# EAGLE board Band-PCB (EAGLE 9.6.2)
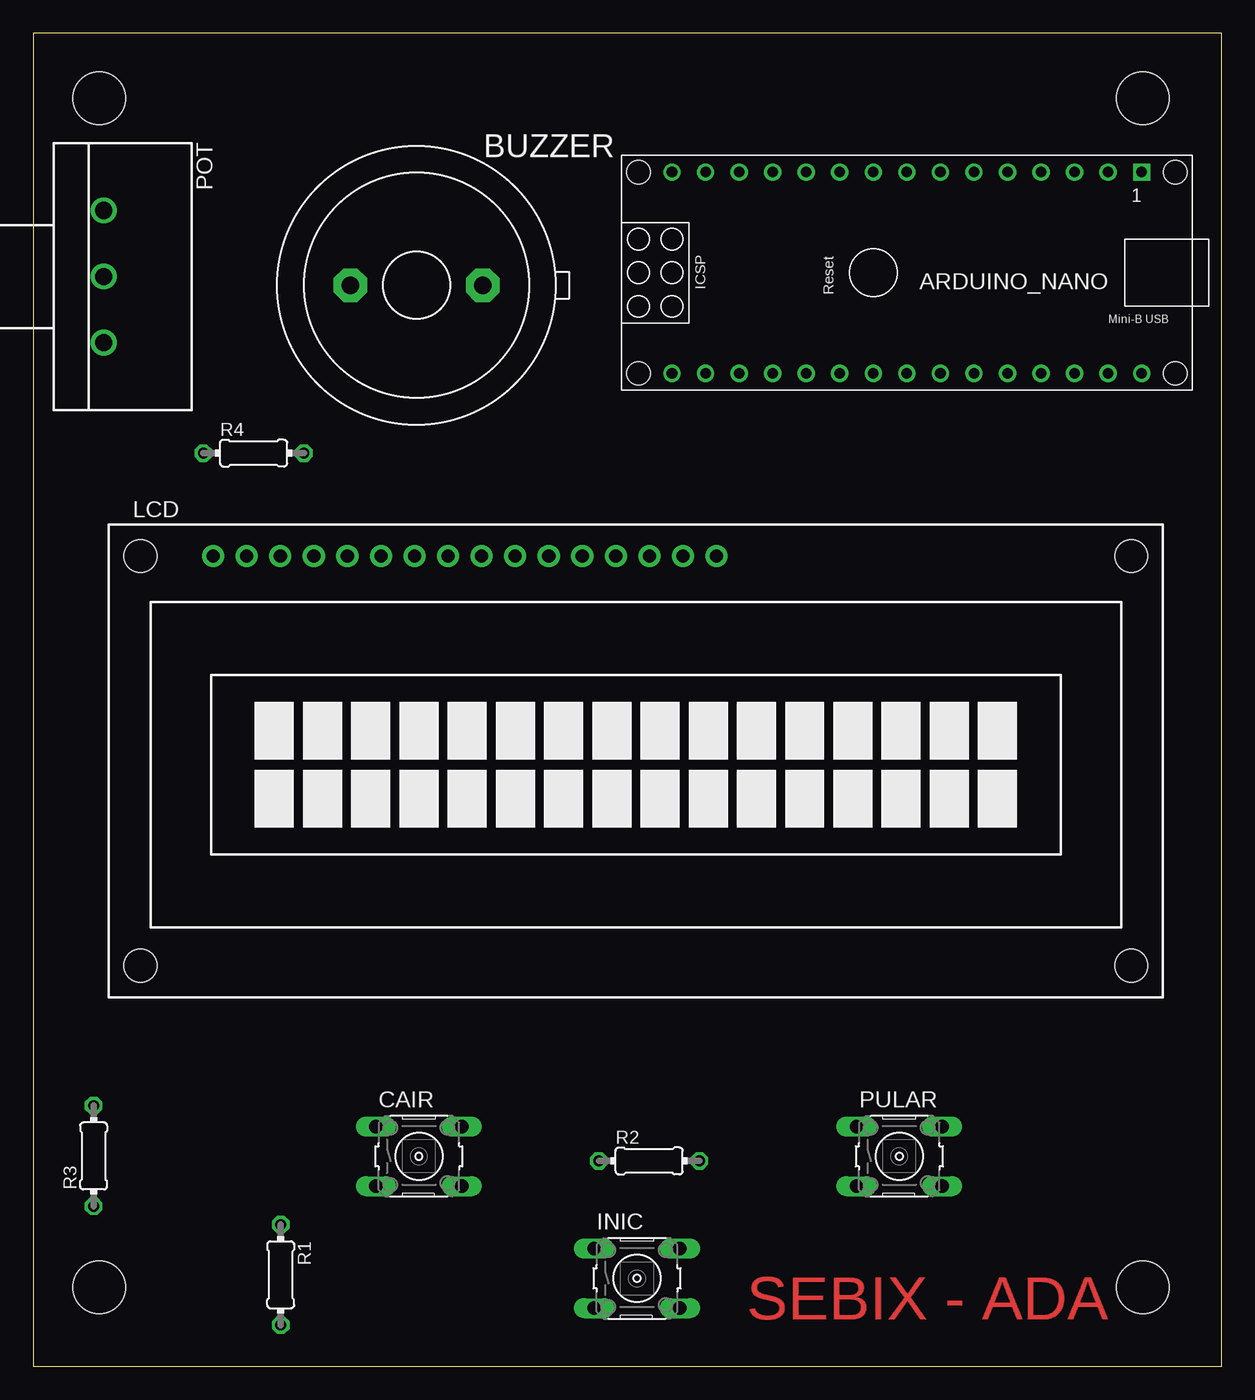
[diagram p0: board, top side]
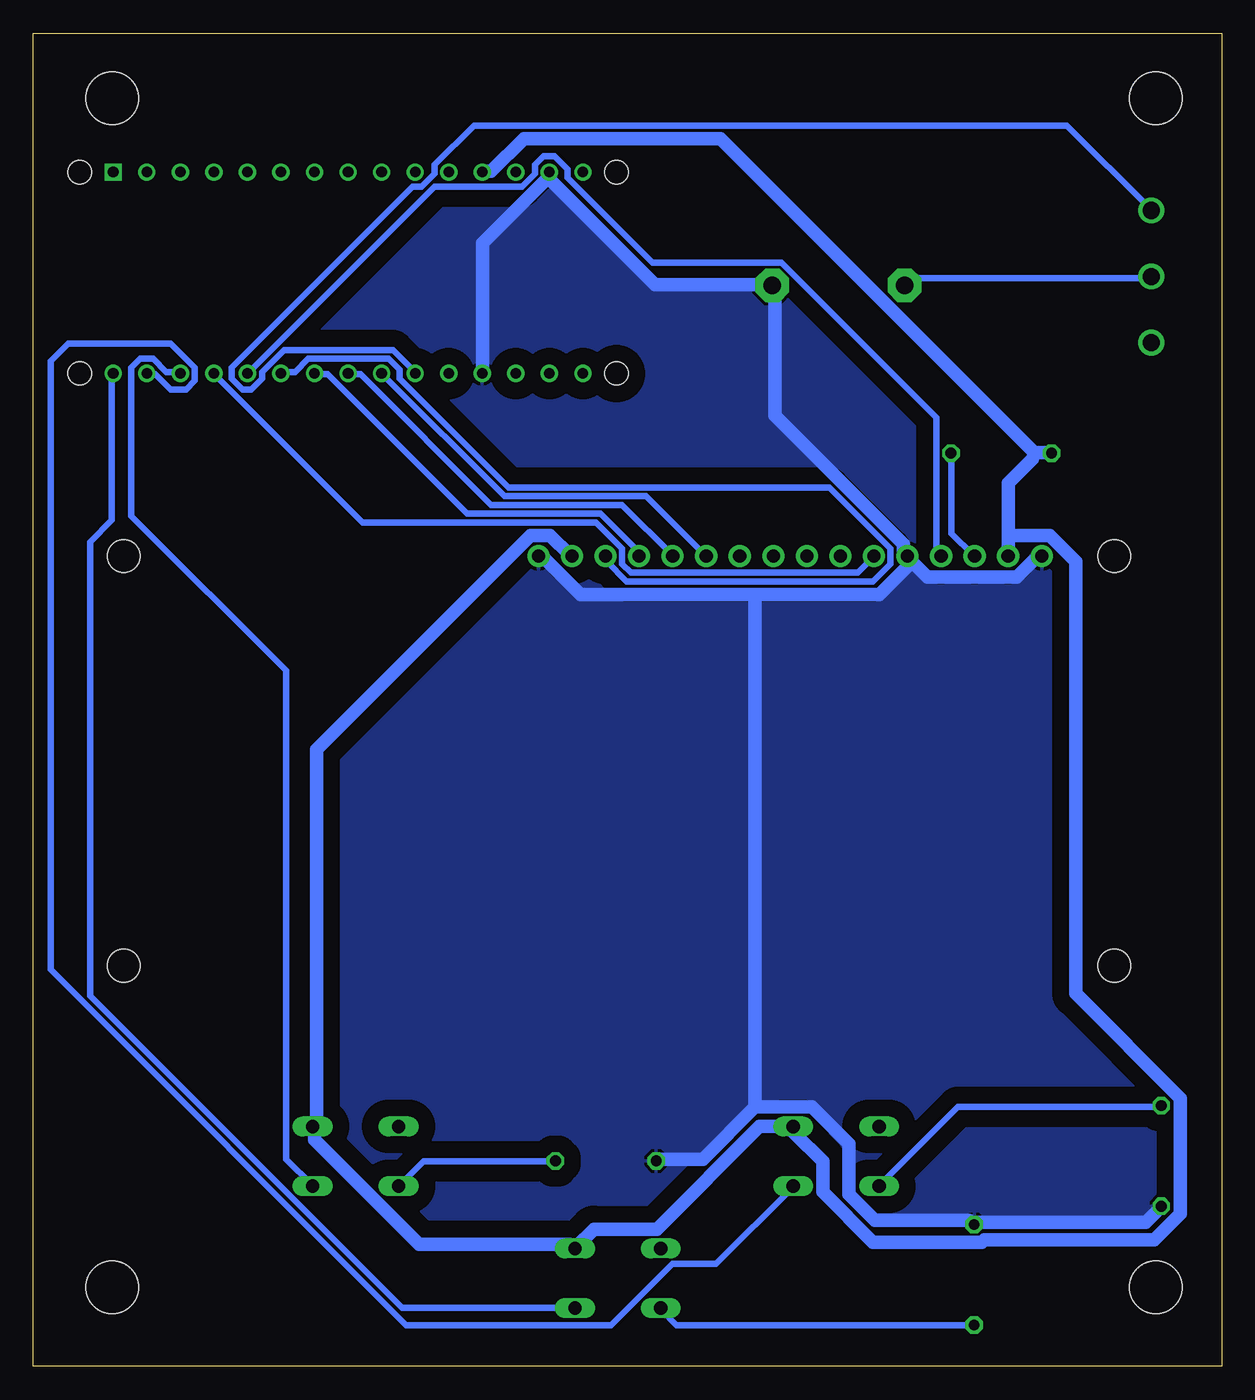
[diagram p1: board, bottom side, seen from below]

Size 90 x 100.94 mm. Coordinates in mm from the lower left corner, seen from the top.
Outline: 0,0 90,0 90,100.94 0,100.94 0,0
Copper layers (1*16): Top 0.035mm / dielectric 1.5mm / Bottom 0.035mm
Design rules "default": minimum track width 6mil, minimum drill 0.35mm, track to track 6mil, track to pad 6mil, pad to pad 6mil, via to via 6mil, smd to smd 6mil, copper to edge 40mil, drill to drill 6mil, minimum pad ring 10mil, minimum via ring 8mil, stop-mask expansion 4mil, vias tented up to drill 0mil, thermal gap 10mil
Net classes: 0 default: width 0.508 mm; 1 Alimentacao: width 1.016 mm
Holes 4 mm at 5,96 84,96 84,6 5,6

## Footprints (pad centres in the part's own frame; a part is rotated, then mirrored left to right if it is on the bottom)
ARDUINO_NANO = drill 0.8 square: 1 -20.32,-7.62 | drill 0.8: 2 -17.78,-7.62; 3 -15.24,-7.62; 4 -12.7,-7.62; 5 -10.16,-7.62; 6 -7.62,-7.62; 7 -5.08,-7.62; 8 -2.54,-7.62; 9 0,-7.62; 10 2.54,-7.62; 11 5.08,-7.62; 12 7.62,-7.62; 13 10.16,-7.62; 14 12.7,-7.62; 15 15.24,-7.62; 16 15.24,7.62; 17 12.7,7.62; 18 10.16,7.62; 19 7.62,7.62; 20 5.08,7.62; 21 2.54,7.62; 22 0,7.62; 23 -2.54,7.62; 24 -5.08,7.62; 25 -7.62,7.62; 26 -10.16,7.62; 27 -12.7,7.62; 28 -15.24,7.62; 29 -17.78,7.62; 30 -20.32,7.62 | hole 1.778: -22.86,-7.62; -22.86,7.62; 17.78,7.62; 17.78,-7.62
F/EE21P = drill 1.321 pad 2.54 octagon: 1 -5.004,0; 2 5.004,0
B3F-10XX = drill 1.016 long: 1 -3.251,2.261; 2 3.251,2.261; 3 -3.251,-2.261; 4 3.251,-2.261
TUXGR_16X2_R2 = drill 1 pad 1.676: 1 -32,15.5; 2 -29.46,15.5; 3 -26.92,15.5; 4 -24.38,15.5; 5 -21.84,15.5; 6 -19.3,15.5; 7 -16.76,15.5; 8 -14.22,15.5; 9 -11.68,15.5; 10 -9.14,15.5; 11 -6.6,15.5; 12 -4.06,15.5; 13 -1.52,15.5; 14 1.02,15.5; 15 3.56,15.5; 16 6.1,15.5 | hole 2.5: -37.5,-15.5; 37.5,-15.5; -37.5,15.5; 37.5,15.5
CIP20C-6MM = drill 1.3 pad 1.93: A -5,0; E 5,0; S 0,0
0204/7 = drill 0.813 octagon: 1 -3.81,0; 2 3.81,0

## Placement (x,y rotation side)
ARDUINO_NANO  [ARDUINO_NANO]  63.61,82.79 180 top
BUZZER  F/EE21P  [F/EE21P]  29.03,81.85 0 top
CAIR  [B3F-10XX]  29.21,15.91 0 top
INIC  [B3F-10XX]  45.72,6.67 0 top
LCD  TUXGR_16X2_R2  [TUXGR_16X2_R2]  45.64,45.85 0 top
POT  [CIP20C-6MM]  5.35,82.51 270 top
PULAR  [B3F-10XX]  65.58,15.91 0 top
R1  [0204/7]  18.75,6.94 270 top
R2  [0204/7]  46.64,15.56 0 top
R3  [0204/7]  4.59,15.94 90 top
R4  [0204/7]  16.7,69.14 0 top

## Library data of the parts
ARDUINO_NANO = ArduinoNanoV30
BUZZER = buzzer; OC_FARNELL: unknown; OC_NEWARK: unknown
CAIR INIC PULAR = switch-omron; MPN: B3F-1000; OC_FARNELL: 176432; OC_NEWARK: 36M3542
LCD = display-lcd; OC_FARNELL: unknown; OC_NEWARK: unknown
POT = pot
R1-R4 = rcl; SPICEPREFIX: R

## Nets
GND [Alimentacao]: ARDUINO_NANO.14 ARDUINO_NANO.19 BUZZER.2 LCD.1 LCD.5 LCD.16 R1.1 R2.1 R3.1
N$1: ARDUINO_NANO.25 LCD.14
N$2: ARDUINO_NANO.30 INIC.4
N$3: ARDUINO_NANO.29 CAIR.4
N$4: ARDUINO_NANO.28 PULAR.4
N$5: PULAR.3 R2.2
N$6: INIC.3 R1.2
N$7: CAIR.3 R3.2
N$8: ARDUINO_NANO.24 LCD.13
N$9: ARDUINO_NANO.23 LCD.12
N$10: ARDUINO_NANO.22 LCD.11
N$11: ARDUINO_NANO.26 LCD.4
N$12: ARDUINO_NANO.27 LCD.6
N$13: LCD.3 R4.2
N$14: ARDUINO_NANO.21 POT.A
N$15: BUZZER.1 POT.S
VCC [Alimentacao]: ARDUINO_NANO.12 CAIR.2 INIC.2 LCD.2 LCD.15 PULAR.2 R4.1
VIN [Alimentacao]: ARDUINO_NANO.15

## Tracks (layer width: path | path; a pad name or v marks a point on that pad's centre or on a via)
GND
  Bottom 1.016: R3.1 4.62,12.05 5.78,10.9 18.66,10.9 R1.1 19.15,11.06 26.25,11.06 28.23,13.04 28.23,16.84 31.04,19.65 35.33,19.65 | 35.33,19.65 39.29,15.68 42.76,15.68 R2.1 | 51.02,89.98 55.97,85.03 55.97,75.29 ARDUINO_NANO.19 | 51.02,89.98 51.02,90.31 ARDUINO_NANO.14 | 51.02,89.98 42.93,81.89 34.18,81.89 BUZZER.2 33.85,81.39 33.85,71.98 24.11,62.24 24.11,61.75 LCD.5 | LCD.1 13.7,61.25 14.03,61.25 15.52,59.77 22.29,59.77 23.77,61.25 LCD.5 | 35.33,58.45 25.92,58.45 23.77,60.59 LCD.5 | 35.33,58.45 48.54,58.45 51.35,61.25 51.68,61.25 LCD.16 | 35.33,58.45 35.33,19.65
  pour Bottom (isolate 1.27): 1.17,99.77 1.17,2.64 2.95,0.86 85.5,0.86 89.76,5.13 89.76,95.76 85.19,100.33 82.35,100.33 1.78,100.33 1.22,99.77
N$1
  Bottom 0.508: ARDUINO_NANO.25 71.16,75.29 70.17,75.29 69.18,76.28 63.07,76.28 62.24,75.45 62.24,74.79 53.99,66.53 29.72,66.53 25.09,61.91 25.09,60.76 26.42,59.44 45.07,59.44 46.56,60.92 46.56,61.25 LCD.14
N$2
  Bottom 0.508: ARDUINO_NANO.30 84.04,75.12 84.04,64.06 85.69,62.41 85.69,28.07 62.08,4.46 49.03,4.46 INIC.4
N$3
  Bottom 0.508: ARDUINO_NANO.29 81.23,75.12 80.73,75.12 79.58,73.97 78.42,73.97 77.76,74.62 77.76,75.62 79.58,77.43 87.34,77.43 88.66,76.11 88.66,30.05 61.75,3.14 46.23,3.14 41.6,7.76 38.3,7.76 32.52,13.54 CAIR.4
N$4
  Bottom 0.508: ARDUINO_NANO.28 78.92,75.29 79.91,75.29 80.9,76.28 81.89,76.28 82.55,75.62 82.55,64.39 70.83,52.67 70.83,15.68 68.85,13.7 PULAR.4
N$5
  Bottom 0.508: R2.2 50.52,15.52 60.43,15.52 62.24,13.7 PULAR.3
N$6
  Bottom 0.508: R1.2 18.82,3.14 41.27,3.14 42.43,4.29 INIC.3
N$7
  Bottom 0.508: R3.2 4.62,19.65 19.98,19.65 25.92,13.7 CAIR.3
N$8
  Bottom 0.508: ARDUINO_NANO.24 68.68,75.12 67.69,75.12 57.12,64.55 47.05,64.55 44.25,61.75 44.25,61.42 LCD.13
N$9
  Bottom 0.508: ARDUINO_NANO.23 66.04,75.12 65.22,75.12 55.31,65.22 45.4,65.22 41.6,61.42 LCD.12
N$10
  Bottom 0.508: ARDUINO_NANO.22 63.56,75.12 54.32,65.88 43.59,65.88 39.13,61.42 LCD.11
N$11
  Bottom 0.508: ARDUINO_NANO.26 73.64,75.29 59.6,89.32 53,89.32 52.01,90.31 52.01,90.97 51.35,91.63 50.52,91.63 49.53,90.64 49.53,89.98 43.09,83.54 33.35,83.54 21.63,71.82 21.63,61.75 21.3,61.42 LCD.4
N$12
  Bottom 0.508: ARDUINO_NANO.27 76.28,75.12 65.05,63.89 47.38,63.89 45.4,61.91 45.4,60.76 44.74,60.1 27.57,60.1 26.42,61.25 LCD.6
N$13
  Bottom 0.508: R4.2 20.47,69.01 20.47,63.07 18.82,61.42 LCD.3
N$14
  Bottom 0.508: ARDUINO_NANO.21 61.09,75.29 62.74,76.94 70.99,76.94 72.64,75.29 72.64,74.79 73.47,73.97 74.13,73.97 74.95,74.79 74.95,75.62 61.25,89.32 60.59,89.32 59.6,90.31 59.6,90.97 56.63,93.94 11.72,93.94 5.45,87.67 POT.A
N$15
  Bottom 0.508: POT.S 5.45,82.39 23.44,82.39 23.94,81.89 BUZZER.1
VCC
  Bottom 1.016: 14.2,69.18 37.97,92.95 52.83,92.95 55.31,90.47 55.97,90.47 ARDUINO_NANO.12 | 14.2,69.18 13.04,69.18 R4.1 | 16.18,62.9 16.18,66.86 14.36,68.68 14.2,69.18 | 16.18,62.9 16.18,61.42 LCD.2 | LCD.15 49.37,61.42 50.85,62.9 52.34,62.9 68.52,46.72 68.52,18.66 PULAR.2 68.68,18.16 68.68,17.17 60.76,9.25 49.37,9.25 INIC.2 48.87,9.08 47.55,10.4 42.76,10.4 35,18.16 32.52,18.16 CAIR.2 32.36,17.67 30.21,15.52 30.21,13.21 26.42,9.41 18.16,9.41 18,9.58 5.12,9.58 3.14,11.56 3.14,20.31 11.06,28.23 11.06,60.92 13.04,62.9 16.18,62.9

## Text on the board
Top: SEBIX - ADA